# Allegro board aide_v1a.brd
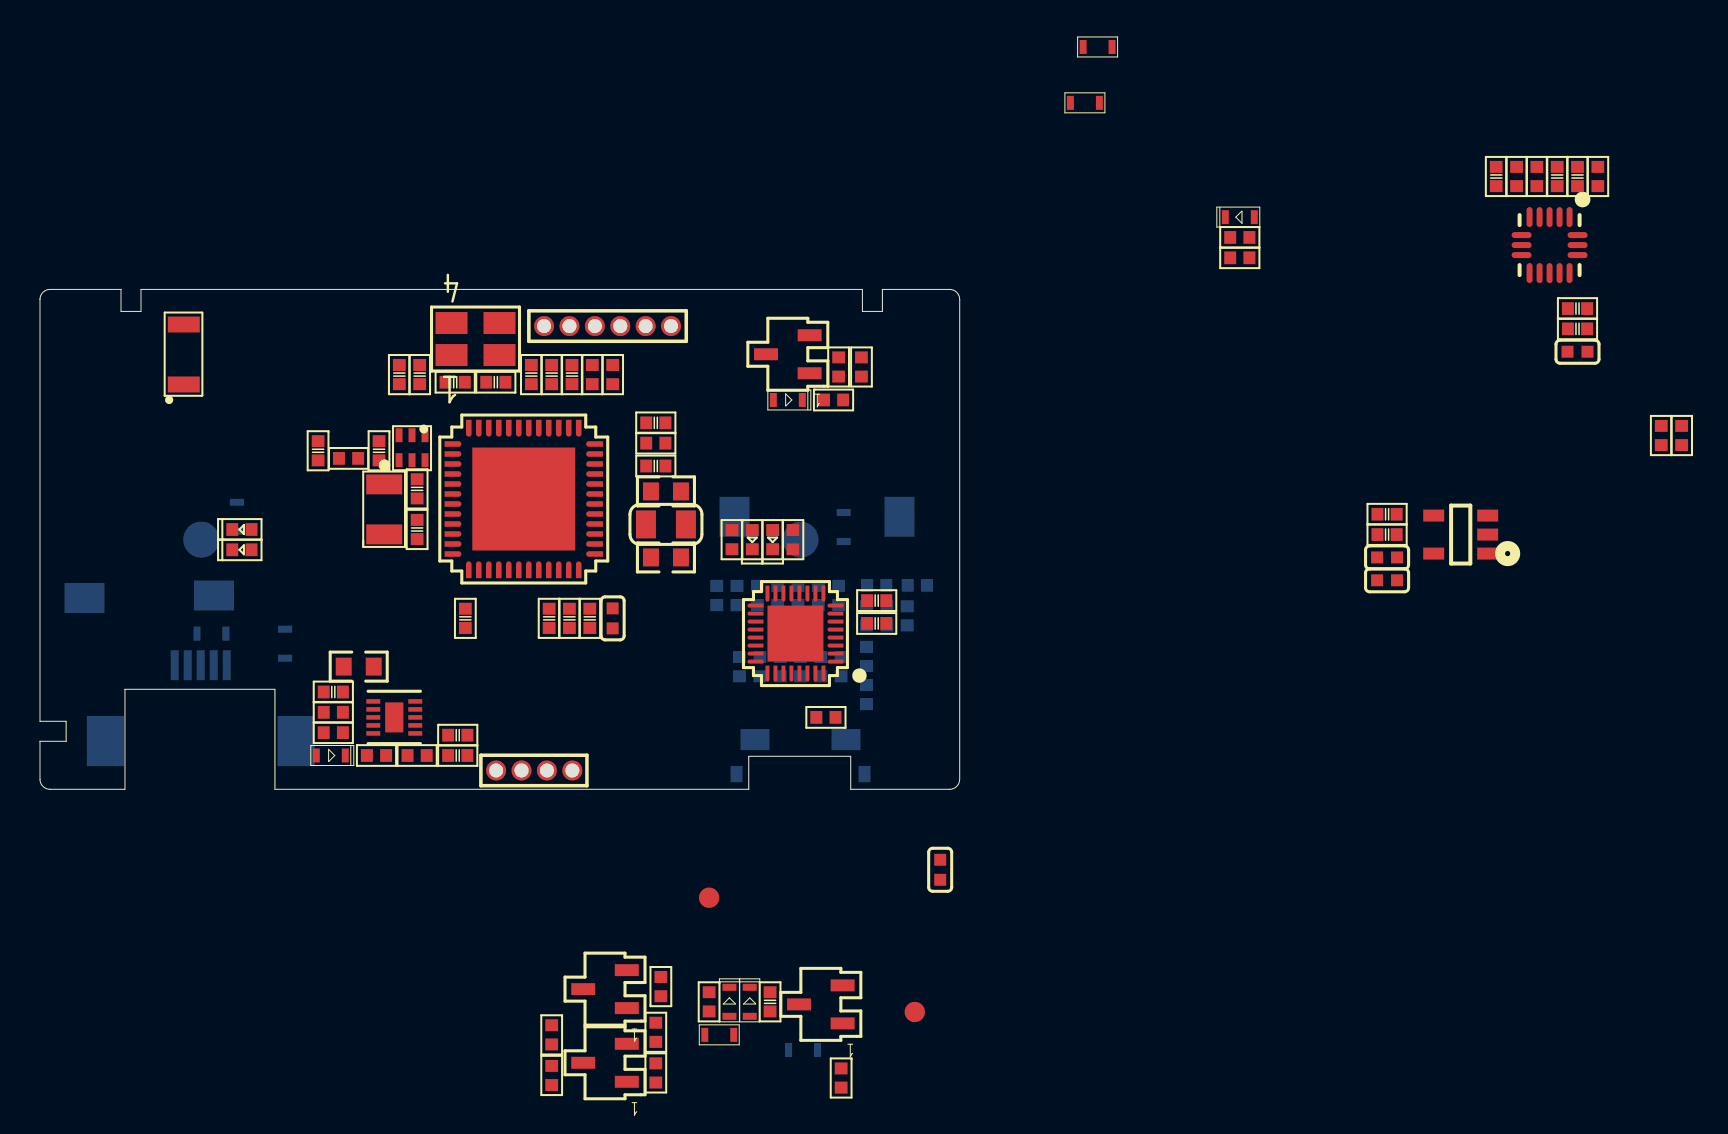
[diagram p0: board, top side]
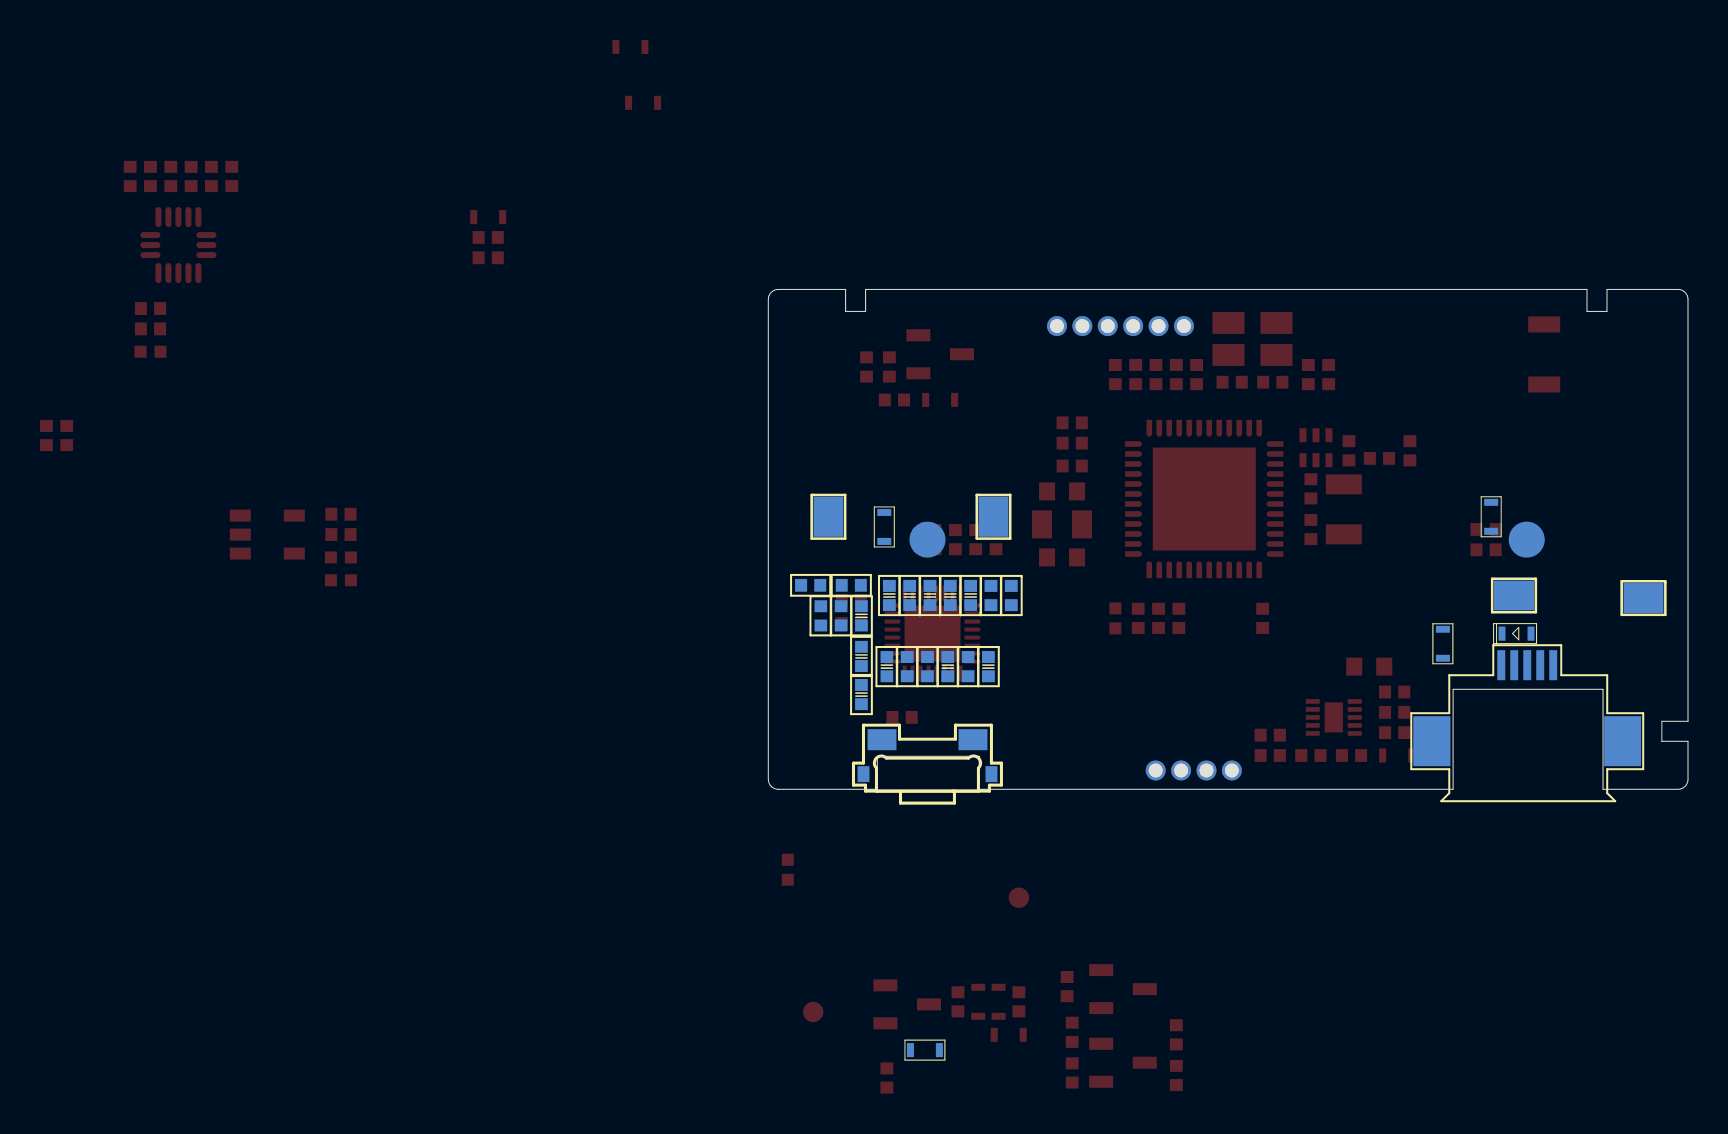
[diagram p1: board, bottom side, seen from below]

Outline 46 x 25 mm; copper layers: TOP, GND02, PWR03, BOTTOM. Coordinates in mm from the lower left corner of the outline.
Outline path: 0,24.5 arc(0.15,24.85) 0.5,25 4.05,25 4.05,23.9 5.05,23.9 5.05,25 41.13,25 41.13,23.9 42.13,23.9 42.13,25 45.5,25 arc(45.85,24.85) 46,24.5 46,0.5 arc(45.85,0.15) 45.5,0 40.55,0 40.55,1.65 35.45,1.65 35.45,0 11.75,0 11.75,5 4.25,5 4.25,0 0.5,0 arc(0.15,0.15) 0,0.5 0,2.4 1.31,2.4 1.31,3.4 0,3.4 0,24.5

## Design rules (mm)
net group DIFF_RF: nets RF+ RF-
net group RF_50OM: nets RF_1

## Placement (name value [footprint] x y rotation side)
ANT1  ANT  [CHIP_ANTENNA_2G45]  7.19 20.25 90 top
B1  Balun  [BALUN_CC25XX]  19.26 16.46 180 top
C1  0.1uF/0402  [C0402]  41.85 8.29 180 top
C2  0.1uF/0402  [C0402]  40.07 6.14 270 bottom
C3  1.5nF/50V/10%  [C0402]  37.02 6.14 270 bottom
C4  1uF/0402  [C0402]  35.88 9.69 270 bottom
C5  1uF/0402  [C0402]  76.9 23.03 0 top
C6  0.1uF/0402  [C0402]  36.9 9.69 90 bottom
C7  0.1uF/0402  [C0402]  76.9 24.04 0 top
C8  4.7nF/50V/10%  [C0402]  41.34 4.74 270 bottom
C9  0.1uF/0402  [C0402]  38.93 9.69 90 bottom
C10  10uF/50V/10%  [C0402]  39.94 9.69 90 bottom
C11  1uF/0402  [C0402]  37.91 9.69 270 bottom
C12  4.7nF/50V/10%  [C0402]  41.85 9.44 180 top
C13  1uF/0402  [C0402]  34.99 6.14 90 bottom
C14  NC/0402  [C0402]  27.5 8.55 90 top
C15  0.1uF/0402  [C0402]  25.47 8.55 90 top
C16  0.1uF/0402  [C0402]  25.59 20.74 270 top
C17  0.1uF/0402  [C0402]  21.28 8.55 90 top
C18  10uF/0603  [C0603]  31.31 14.9 0 top
C19  100nF/0402  [C0402]  30.8 16.17 180 top
C20  10uF/0603  [C0603]  31.31 11.6 180 top
C21  0.1uF/0402  [C0402]  24.58 20.74 270 top
C22  0.1uF/0402  [C0402]  18.99 20.74 270 top
C23  NC/0402  [C0402]  17.97 20.74 270 top
C24  0.1uF/0402  [C0402]  30.8 18.33 180 top
C25  NC/0402  [C0402]  16.96 16.93 270 top
C26  NC/0402  [C0402]  13.91 16.93 270 top
C27  12pF/0402  [C0402]  18.86 15.03 270 top
C28  12pF/0402  [C0402]  18.86 12.99 90 top
C29  1uF/0402  [C0402]  26.48 8.55 90 top
C30  NC/15pF/0402  [C0402]  20.77 20.36 0 top
C31  NC/15pF/0402  [C0402]  22.8 20.36 180 top
C32  1uF/0402  [C0402]  26.61 20.74 270 top
C36  0.1uF/0402  [C0402]  36.52 -10.63 90 top
C37  0.1uF/0402  [C0402]  67.38 13.76 0 top
C38  1uF/0402  [C0402]  67.38 12.74 0 top
C40  10uF/0603  [C0603]  15.94 6.14 180 top
C41  0.1uF/0402  [C0402]  14.67 4.87 180 top
C42  4.7uF/16V/10%/X5R  [C0402]  20.89 1.69 0 top
C43  0.1uF/0402  [C0402]  20.89 2.71 0 top
C44  4.7uF/16V/10%/X5R  [C0402]  72.84 30.65 90 top
C45  0.1uF/0402  [C0402]  76.9 30.65 270 top
C46  0.1uF/0402  [C0402]  75.89 30.65 270 top
C47  47pF/50V/10%  [C0402]  41.34 6.64 90 bottom
C48  47pF/50V/10%  [C0402]  41.34 8.68 270 bottom
CON1  MOTOR+  [BATTERY_PAD]  42.99 13.63 180 bottom
CON2  MOTOR-  [BATTERY_PAD]  34.74 13.63 180 bottom
D1  ESD5V0D5B/30kV  [SOD_523]  40.2 13.12 90 bottom
D2  ESD5V0D5B/30kV  [SOD_523]  9.85 13.63 90 bottom
D3  1N4148  [SOD_523_P]  37.4 19.47 180 top
D4  NC/ESD5V0D5B/30kV  [SOD_523]  33.98 -12.28 180 top
D5  NC/ESD5V0D5B/30kV  [SOD_523]  38.17 -13.04 180 bottom
D6  1N4148  [SOD_523_P]  34.48 -10.63 270 top
D8  1N4148  [SOD_523_P]  35.5 -10.63 270 top
D9  ESD5V0D5B/30kV  [SOD_523]  12.26 7.28 270 bottom
D10  1N4148  [SOD_523_P]  60.01 28.61 0 top
D11  1N4148  [SOD_523_P]  14.54 1.69 180 top
D12  NC/1N4148  [SOD_523_P]  8.58 7.79 180 bottom
D13  NC/ESD5V0D5B/30kV  [SOD_523]  52.9 37.12 0 top
D14  NC/ESD5V0D5B/30kV  [SOD_523]  52.26 34.33 0 top
FB1  PZ1005E121-R70TF  [L0402]  45.02 -4.02 270 top
FB2  PZ1005E121-R70TF  [L0402]  76.9 21.88 180 top
FB3  PZ1005E121-R70TF  [L0402]  28.64 8.55 270 top
FB4  PZ1005E121-R70TF  [L0402]  67.38 11.6 0 top
FB5  PZ1005E121-R70TF  [L0402]  67.38 10.45 0 top
J1  CON  [HD6P127]  25.21 23.17 0 top
J2  CON4  [HD4P127]  22.81 0.94 0 top
J3  usb_embed  [USB_EMBED]  8.04 6.21 180 bottom
JS2  Battary_in  [BATTERY_PAD]  8.7 9.69 270 bottom
JS3  Battary_GND  [BATTERY_PAD]  2.23 9.56 270 bottom
L1  10UH/0.11A/0805  [L0805]  31.31 13.25 180 top
LED1  LED  [LED0402]  35.63 12.49 90 top
LED2  LED  [LED0402]  10.1 12.99 0 top
LED3  LED  [LED0402]  36.64 12.49 90 top
LED4  LED  [LED0402]  10.1 11.98 0 top
NOREF  -  []  30.31 13.25 0 top
PG1  PogoPin  [POGOPIN_SMD_1MM5]  38.04 12.49 180 bottom
PG2  PogoPin  [POGOPIN_SMD_1MM5]  8.07 12.49 180 bottom
Q1  CJ2302  [SOT23P95W290X130H115]  37.4 21.76 180 top
Q2  AP2301GN  [SOT23P95W290X130H115]  39.06 -10.76 180 top
Q3  FHS3904  [SOT23P95W290X130H115]  28.26 -13.68 180 top
Q4  FHS3904  [SOT23P95W290X130H115]  28.26 -9.99 180 top
R1  10K/1%/0402  [R0402]  77.92 30.65 90 top
R2  51K/1%/0402  [R0402]  43.37 8.68 270 bottom
R3  51K/1%/0402  [R0402]  42.36 8.68 270 bottom
R4  10M/1%/0402  [R0402]  43.88 10.2 180 bottom
R5  10M/1%/0402  [R0402]  41.85 10.2 0 bottom
R6  100k/0402  [R0402]  38.04 6.14 270 bottom
R7  0R  [R0402]  39.06 6.14 270 bottom
R8  10k/1%/0402  [R0402]  34.86 9.69 270 bottom
R9  1M/1%/0402  [R0402]  36.01 6.14 270 bottom
R10  0R  [R0402]  33.85 9.69 270 bottom
R11  0R  [R0402]  81.09 17.69 270 top
R12  270R/0402  [R0402]  34.61 12.49 270 top
R13  270R/0402  [R0402]  82.11 17.69 90 top
R14  22R  [R0402]  39.69 19.47 0 top
R15  100k/0402  [R0402]  30.8 17.31 180 top
R16  0R  [R0402]  15.43 16.55 0 top
R17  10k/1%/0402  [R0402]  39.94 21.12 90 top
R18  18.2k/1%/0402  [R0402]  28.64 20.74 270 top
R19  10k/1%/0402  [R0402]  27.63 20.74 90 top
R20  1M/1%/0402  [R0402]  40.07 -14.44 270 top
R21  10k/1%/0402  [R0402]  25.59 -14.31 270 top
R22  1k/1%/0402  [R0402]  25.59 -12.28 270 top
R23  100k/0402  [R0402]  30.8 -14.18 90 top
R24  10k/1%/0402  [R0402]  33.47 -10.63 270 top
R25  100k/0402  [R0402]  30.8 -12.15 90 top
R26  10k/1%/0402  [R0402]  31.05 -9.87 90 top
R27  0R/NC  [R0402]  60.01 26.58 0 top
R28  0R  [R0402]  60.01 27.6 180 top
R29  0R  [R0402]  16.83 1.69 0 top
R30  1.5k/0402  [R0402]  18.86 1.69 0 top
R31  2.7K/0402  [R0402]  14.67 3.85 180 top
R32  1.5k/0402  [R0402]  37.66 12.49 90 top
R33  1.5k/0402  [R0402]  39.31 3.6 180 top
R34  2K/0402  [R0402]  14.67 2.83 180 top
R35  4.7k/1%/0402  [R0402]  74.87 30.65 270 top
R36  4.7k/1%/0402  [R0402]  73.85 30.65 270 top
R37  1k/1%/0402  [R0402]  41.09 21.12 270 top
S1  Switch  [SW620X350SKSN]  38.04 0.71 180 bottom
TP1  Test Point  [TP_40MIL]  43.75 -11.14 0 top
TP2  Test Point  [TP_40MIL]  33.47 -5.42 0 top
U2  CC2640F128RGZ  [QFN48P50W700X700H100TH]  24.2 14.52 0 top
U3  TPS79133_DBV_5  [SOT_23_5]  71.06 12.74 180 top
U5  BQ24040DSQ  [DSQ10_P9X1P5]  17.72 3.6 0 top
U6  MMA8451Q  [QFN16_5X3]  75.5 27.22 270 top
U7  ads1191  [QFN32P40W400X400H100TH]  37.79 7.79 180 top
Y1  32.768kHz/12.5pF/20PPM  [YS_3215]  17.22 14 90 top
Y3  CRYSTAL_4p  [OSC3225H70]  21.78 22.52 90 top

## Library data of the parts
ANT1 = ANT_1
B1 = Balun_LC_5
C1-C13 C40-C43 C47 C48 = CAP NP
C14-C32 C36-C38 C44-C46 R16 = CAPACITOR NON-POL
CON1 CON2 = CON
D1 D2 = DIODE TS BI-DIR
D3 D6 D8 D10-D12 = 1N5142_1
D4 D5 D9 D13 D14 = DIODE DIAC
FB1-FB5 L1 = INDUCTOR
J1 = SIP6_1.27
J2 = SIP4-1_27
J3 = usb_embed
JS2 JS3 TP1 TP2 = Test Point
LED1-LED4 = F5G1_3
PG1 PG2 = PogoPin
Q1 = CJ2302
Q2 = IRF5210/TO_1
Q3 Q4 = NPN_0
R1-R7 R9-R11 R27-R34 = RESISTOR
R8 R12 R13 R15 R18 R19 R35 R36 = R
R14 R17 R20-R26 R37 = RES/0402_0
S1 = Switch_0
U2 = CC2640F128RGZ
U3 = TPS79133_DBV_5
U5 = bq24040_0
U6 = MMA8451Q_0
U7 = ADS1191
Y1 = CRYSTAL_2pin
Y3 = CRYSTAL_4p

## Footprints (pads in the part's own frame, mm; a bottom-side part is the same pattern mirrored in y, then rotated)
BALUN_CC25XX
  rect 0.35x0.7 smd: 1(1.3,0) 2(0.65,0) 3(0,0) 4(0,-1.25) 5(0.65,-1.25) 6(1.3,-1.25)
BATTERY_PAD
  rect 1.5x2 smd: 1(0,0)
C0402
  rect 0.6x0.64 smd: 1(-0.48,0) 2(0.48,0)
C0603
  rect 0.8x0.9 smd: 1(0.75,0) 2(-0.75,0)
CHIP_ANTENNA_2G45
  rect 0.8x1.6 smd: 1(0,0) 2(3,0)
DSQ10_P9X1P5
  rect 0.7x0.23 smd: 1(-1.05,0.8) 2(-1.05,0.4) 3(-1.05,0) 4(-1.05,-0.4) 5(-1.05,-0.8) 6(1.05,-0.8) 7(1.05,-0.4) 8(1.05,0) 9(1.05,0.4) 10(1.05,0.8)
  rect 0.91x1.5 smd: 11(0,0)
HD4P127
  round 1 hole 0.7: 1(0,0) 2(1.27,0) 3(2.54,0) 4(3.81,0)
HD6P127
  round 1 hole 0.7: 1(0,0) 2(1.27,0) 3(2.54,0) 4(3.81,0) 5(5.08,0) 6(6.35,0)
L0402
  rect 0.6x0.6 smd: 1(0.5,0) 2(-0.5,0)
L0805
  rect 1x1.4 smd: 1(1,0) 2(-1,0)
LED0402
  rect 0.6x0.64 smd: 1(-0.48,0) 2(0.48,0)
OSC3225H70
  rect 1.1x1.6 smd: 1(-0.8,1.2) 2(-0.8,-1.2) 3(0.8,-1.2) 4(0.8,1.2)
POGOPIN_SMD_1MM5
  round 1.8 smd: 1(0,0)
QFN16_5X3
  oval 1x0.3 smd: 1(-1.4,1) 2(-1.4,0.5) 3(-1.4,0) 4(-1.4,-0.5) 5(-1.4,-1) 9(1.4,-1) 10(1.4,-0.5) 11(1.4,0) 12(1.4,0.5) 13(1.4,1)
  oval 0.3x1 smd: 6(-0.5,-1.4) 7(0,-1.4) 8(0.5,-1.4) 14(0.5,1.4) 15(0,1.4) 16(-0.5,1.4)
QFN32P40W400X400H100TH
  custom 0.8x0.2 smd: 1(-2,1.4) 2(-2,1) 3(-2,0.6) 4(-2,0.2) 5(-2,-0.2) 6(-2,-0.6) 7(-2,-1) 8(-2,-1.4) 17(2,-1.4) 18(2,-1) 19(2,-0.6) 20(2,-0.2) 21(2,0.2) 22(2,0.6) 23(2,1) 24(2,1.4)
  custom 0.2x0.8 smd: 9(-1.4,-2) 10(-1,-2) 11(-0.6,-2) 12(-0.2,-2) 13(0.2,-2) 14(0.6,-2) 15(1,-2) 16(1.4,-2) 25(1.4,2) 26(1,2) 27(0.6,2) 28(0.2,2) 29(-0.2,2) 30(-0.6,2) 31(-1,2) 32(-1.4,2)
  rect 2.8x2.8 smd: 33(0,0)
QFN48P50W700X700H100TH
  custom 0.84x0.28 smd: 1(-3.54,2.75) 2(-3.54,2.25) 3(-3.54,1.75) 4(-3.54,1.25) 5(-3.54,0.75) 6(-3.54,0.25) 7(-3.54,-0.25) 8(-3.54,-0.75) 9(-3.54,-1.25) 10(-3.54,-1.75) 11(-3.54,-2.25) 12(-3.54,-2.75) 25(3.54,-2.75) 26(3.54,-2.25) 27(3.54,-1.75) 28(3.54,-1.25) 29(3.54,-0.75) 30(3.54,-0.25) 31(3.54,0.25) 32(3.54,0.75) 33(3.54,1.25) 34(3.54,1.75) 35(3.54,2.25) 36(3.54,2.75)
  custom 0.28x0.84 smd: 13(-2.75,-3.54) 14(-2.25,-3.54) 15(-1.75,-3.54) 16(-1.25,-3.54) 17(-0.75,-3.54) 18(-0.25,-3.54) 19(0.25,-3.54) 20(0.75,-3.54) 21(1.25,-3.54) 22(1.75,-3.54) 23(2.25,-3.54) 24(2.75,-3.54) 37(2.75,3.54) 38(2.25,3.54) 39(1.75,3.54) 40(1.25,3.54) 41(0.75,3.54) 42(0.25,3.54) 43(-0.25,3.54) 44(-0.75,3.54) 45(-1.25,3.54) 46(-1.75,3.54) 47(-2.25,3.54) 48(-2.75,3.54)
  rect 5.15x5.15 smd: 49(0,0)
R0402
  rect 0.6x0.64 smd: 1(-0.48,0) 2(0.48,0)
SOD_523
  rect 0.35x0.7 smd: 1(-0.725,0) 2(0.725,0)
SOD_523_P
  rect 0.35x0.7 smd: 1(-0.725,0) 2(0.725,0)
SOT23P95W290X130H115
  rect 1.2x0.6 smd: 1(-1.09,0.95) 2(-1.09,-0.95) 3(1.09,0)
SOT_23_5
  rect 1.05x0.6 smd: 1(-1.35,0.95) 2(-1.35,0) 3(-1.35,-0.95) 4(1.35,-0.95) 5(1.35,0.95)
SW620X350SKSN
  rect 1.45x1.05 smd: 1(-2.275,1.775) 2(2.275,1.775)
  rect 0.6x0.8 smd: 3(3.2,0.05) 4(-3.2,0.05)
TP_40MIL
  round 1.02 smd: 1(0,0)
USB_EMBED
  rect 0.4x1.5 smd: 1(-1.3,0) 2(-0.65,0) 3(0,0) 4(0.65,0) 5(1.3,0)
  rect 1.85x2.5 smd: 6(4.77,-3.8) 7(-4.77,-3.8)
YS_3215
  rect 1x1.8 smd: 1(-1.25,0) 2(1.25,0)

## Nets
AVDD: C1.2 C2.2 C4.2 C6.2 FB1.2 R8.2 U7.5(IN2N) U7.6(IN2P) U7.12(AVDD) U7.31(IN3P) U7.32(IN3N)
DVDD: C5.2 C7.2 FB2.2 R1.2 U7.23(DVDD)
GND: B1.2(GND#2) B1.5(GND#5) B1.6(GND#6) C5.1 C7.1 C11.2 C13.2 C14.1 C15.1 C16.1 C17.1 C18.1 C19.1 C20.1 C21.1 C22.1 C23.1 C24.1 C25.1 C26.1 C27.1 C28.1 C29.1 C30.1 C31.1 C32.1 C36.1 C37.1 C38.1 C40.2 C41.2 C42.2 C43.2 C44.1 C45.1 C46.1 D1.2 D2.2 D4.2 D5.2 D9.1 D12.2 D13.1 D14.1 J1.6 J2.4 J3.5(GND) J3.6(M1) J3.7(M2) JS3.1 Q1.2(S) Q3.2(E) Q4.2(E) R10.2 R11.2 R12.1 R13.1 R17.2 R19.2 R25.2 R26.2 R28.1 R31.2 R34.2 S1.3(C) S1.4(D) U2.49(VSS) U3.2(GND) U3.3(\E\N) U5.3(VSS) U5.11(PAD) U6.5(GND#5) U6.7(SA0) U6.10(GND#10) U6.12(GND#12) U7.24(DGND) U7.25(GPIO2) U7.26(GPIO1) U7.33(GND1) Y3.2 Y3.4
GND_SIGNAL: C1.1 C2.1 C4.1 C6.1 C9.1 C10.1 C47.1 C48.1 R10.1 R11.1 U7.10(VREFN) U7.13(AVSS)
VDD_3V3: C38.2 FB4.1 FB5.1 U3.5(OUT)
VDD_3V3_AFE: FB1.1 FB2.1 FB4.2
VDD_3V3_BLE: FB3.1 FB5.2 J2.1 R14.2 R21.2
VDD_BLE: C44.2 C45.2 R35.1 R36.1 U6.1(VDDIO) U6.14(VDD)
VDDR: C20.2 C21.2 C22.2 C23.2 L1.2 U2.45(VDDR) U2.48(VDDR_RF)
VDDS: C14.2 C15.2 C16.2 C17.2 C18.2 C19.2 FB3.2 R15.1 U2.13(VDDS2) U2.22(VDDS3) U2.34(VDDS_DCDC) U2.44(VDDS)
VIN_USB: C40.1 C41.1 D9.2 D12.1 J3.1(VIN) R27.2 U5.1(IN)
ADS1291_RST: U2.28(DIO_18) U7.15(P\W\D\N\&R\S\T\)
BAT_DET: C32.2 R18.2 R19.1 U2.41(DIO_28)
DCDC_SW: L1.1 U2.33(DCDC_SW)
JTAG_TCK: D14.2 J1.4 J3.3(D+) U2.25(JTAG_TCK)
JTAG_TDI: J1.2 U2.27(DIO_17/JJTAG_TDI)
JTAG_TDO: J1.1 U2.26(DIO_16/JTAG_TDO)
JTAG_TMS: D13.2 J1.3 J3.2(D-) U2.24(JTAG_TMS)
KEY_DET: R22.1 U2.18(DIO_12)
KEY_EN: D8.2 U2.17(DIO_11)
LA: D2.1 PG2.1 R3.1 R5.2
LED1_SIGNAL: LED1.2(ANODE) U2.12(DIO_7)
LED2_SIGNAL: LED2.2(ANODE) U2.11(DIO_6)
MOTOR_EN: R37.1 U2.32(DIO_22)
NRESET: C24.2 J1.5 R15.2 U2.35(RESET_N)
RA: D1.1 PG1.1 R2.1 R4.2
RF+: B1.4(D+) U2.1(RF_P)
RF-: B1.3(D-) U2.2(RF_N)
RF_1: B1.1(S) C25.2 R16.2
RLDOUT: C3.1 R4.1 R5.1 R6.1 R7.1 R9.1
SCL_ACC: R35.2 U2.40(DIO_27) U6.4(SCL)
SDA_ACC: R36.2 U2.38(DIO_25) U6.6(SDA)
SPI_CLK: U2.43(DIO_30) U7.20(SCLK)
SPI_CS: R1.1 U2.39(DIO_26) U7.18(C\S\)
SPI_DRDY: U2.29(DIO_19) U7.22(D\R\D\Y\)
SPI_MISO: U2.37(DIO_24) U7.21(DOUT)
SPI_MOSI: U2.36(DIO_23) U7.19(DIN)
SPI_START: U2.21(DIO_15) U7.16(START)
UART_RX: J2.3 U2.8(DIO_3)
UART_TX: J2.2 U2.7(DIO_2)
V_BATTARY: C42.1 C43.1 D5.1 JS2.1 Q2.2(S) R20.1 R30.2 R32.1 R33.1 S1.1(A) TP1.1 U5.10(OUT)
V_BATTARY_SYS: C36.2 Q2.3(D) R18.1 U3.1(IN)
WIRE_CHARGING_DETECT: D10.2 U2.30(DIO_20)
WIRE_PWR_GOOD: D11.2 U2.42(DIO_29)
X1_24M: C31.2 U2.46(X24M_N) Y3.3
X2_24M: C30.2 U2.47(X24M_P) Y3.1
N16775846: C48.2 R3.2 U7.4(IN1P)
N16777337: C11.1 U7.11(VCAP1)
N16777340: C13.1 U7.27(VCAP2)
N16780797: C9.2 C10.2 U7.9(VREFP)
N16780865: C8.2 U7.1(PGA1N)
N16780872: C8.1 U7.2(PGA1P)
N16780875: C12.2 U7.7(PGA2N)
N16780878: C12.1 U7.8(PGA2P)
N16799241: C47.2 R2.2 U7.3(IN1N)
N16801025: C3.2 R9.2 U7.28(RLDINV)
N16801092: R7.2 U7.30(RLDOUT)
N16816173: R6.2 U7.29(RLDIN/RLDREF)
N16819333: Q4.1(B) R24.2 R26.1
N16819341: Q2.1(G) Q4.3(C) R20.2
N16819359: D6.1 D8.1 R24.1
N16819363: D4.1 D6.2 R23.2 R25.1 S1.2(B) TP2.1
N16819373: Q3.3(C) R21.1 R22.2
N16819554: Q3.1(B) R23.1
N16820074: C37.2 U3.4(BYPASS)
N16822375: C46.2 U6.2(BYP)
N16822870: D11.1 R29.1 U5.5(/PG)
N16822876: LED3.2(ANODE) R32.2
N16822878: D10.1 LED3.1(CATHODE) LED4.1(CATHODE) U5.8(/CHG)
N16822912: LED4.2(ANODE) R33.2
N16822995: R31.1 U5.2(ISET)
N16823090: R29.2 R30.1
N16823123: R34.1 U5.4(PRE_TERM)
N16823129: R27.1 R28.2 U5.7(ISET2)
N16824236: ANT1.1(IN) C26.2 R16.1
N16824246: C29.2 U2.23(DCOUPL)
N16824278: C28.2 U2.4(X32K_Q2) Y1.1
N16824286: C27.2 U2.3(X32K_Q1) Y1.2
N16830281: R8.1 U7.14(CLKSEL)
N16837674: Q1.1(G) R17.1 R37.2
N16837705: CON2.1 D3.2 Q1.3(D)
N16837883: CON1.1 D3.1 R14.1
N16838016: LED1.1(CATHODE) R12.2
N16838479: LED2.1(CATHODE) R13.2

Pads without a net: ANT1 2; J3 4; U2 5 6 9 10 14 15 16 19 20 31; U5 6 9; U6 3 8 9 11 13 15 16; U7 17

## Text on the board
DEVICE_TYPE_TOP: 25 | 46
COMPVAL_TYPE_BOTTOM: 25.6 | 42.6 | 1
